# Allegro board pc043c_single_maroc_29.brd
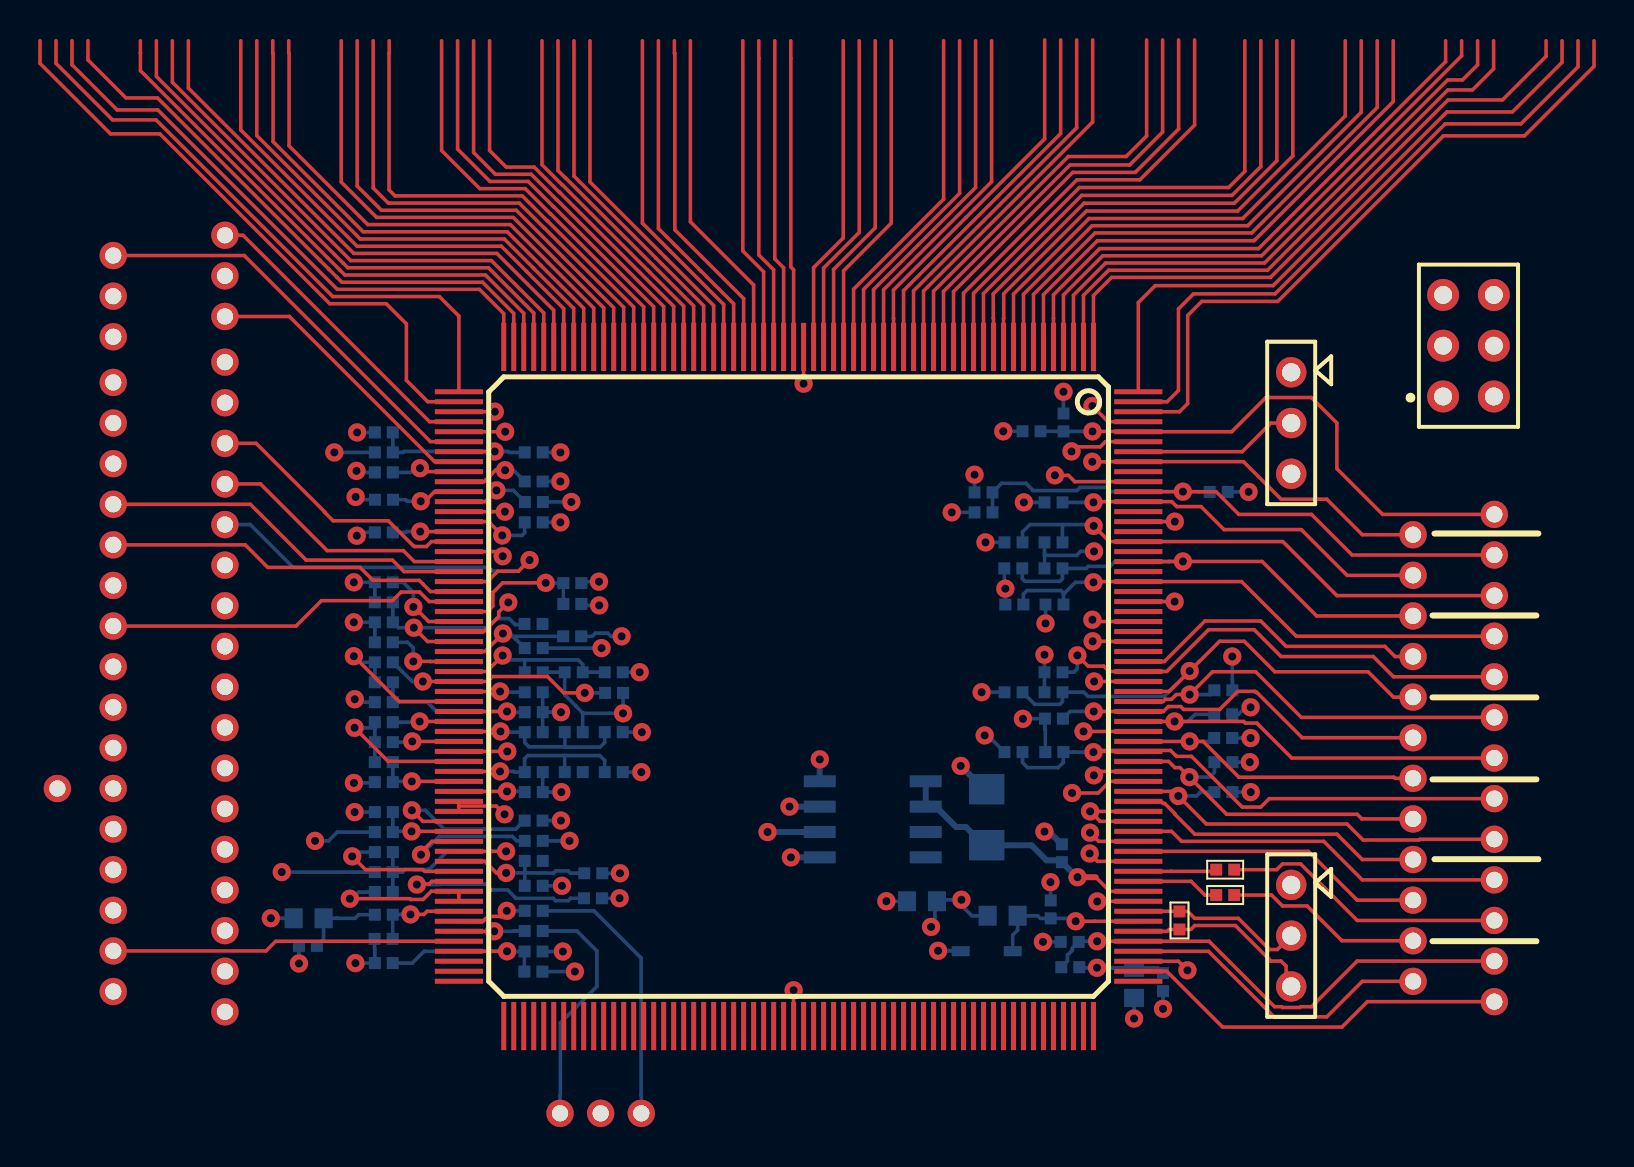
[diagram p0: board, top side]
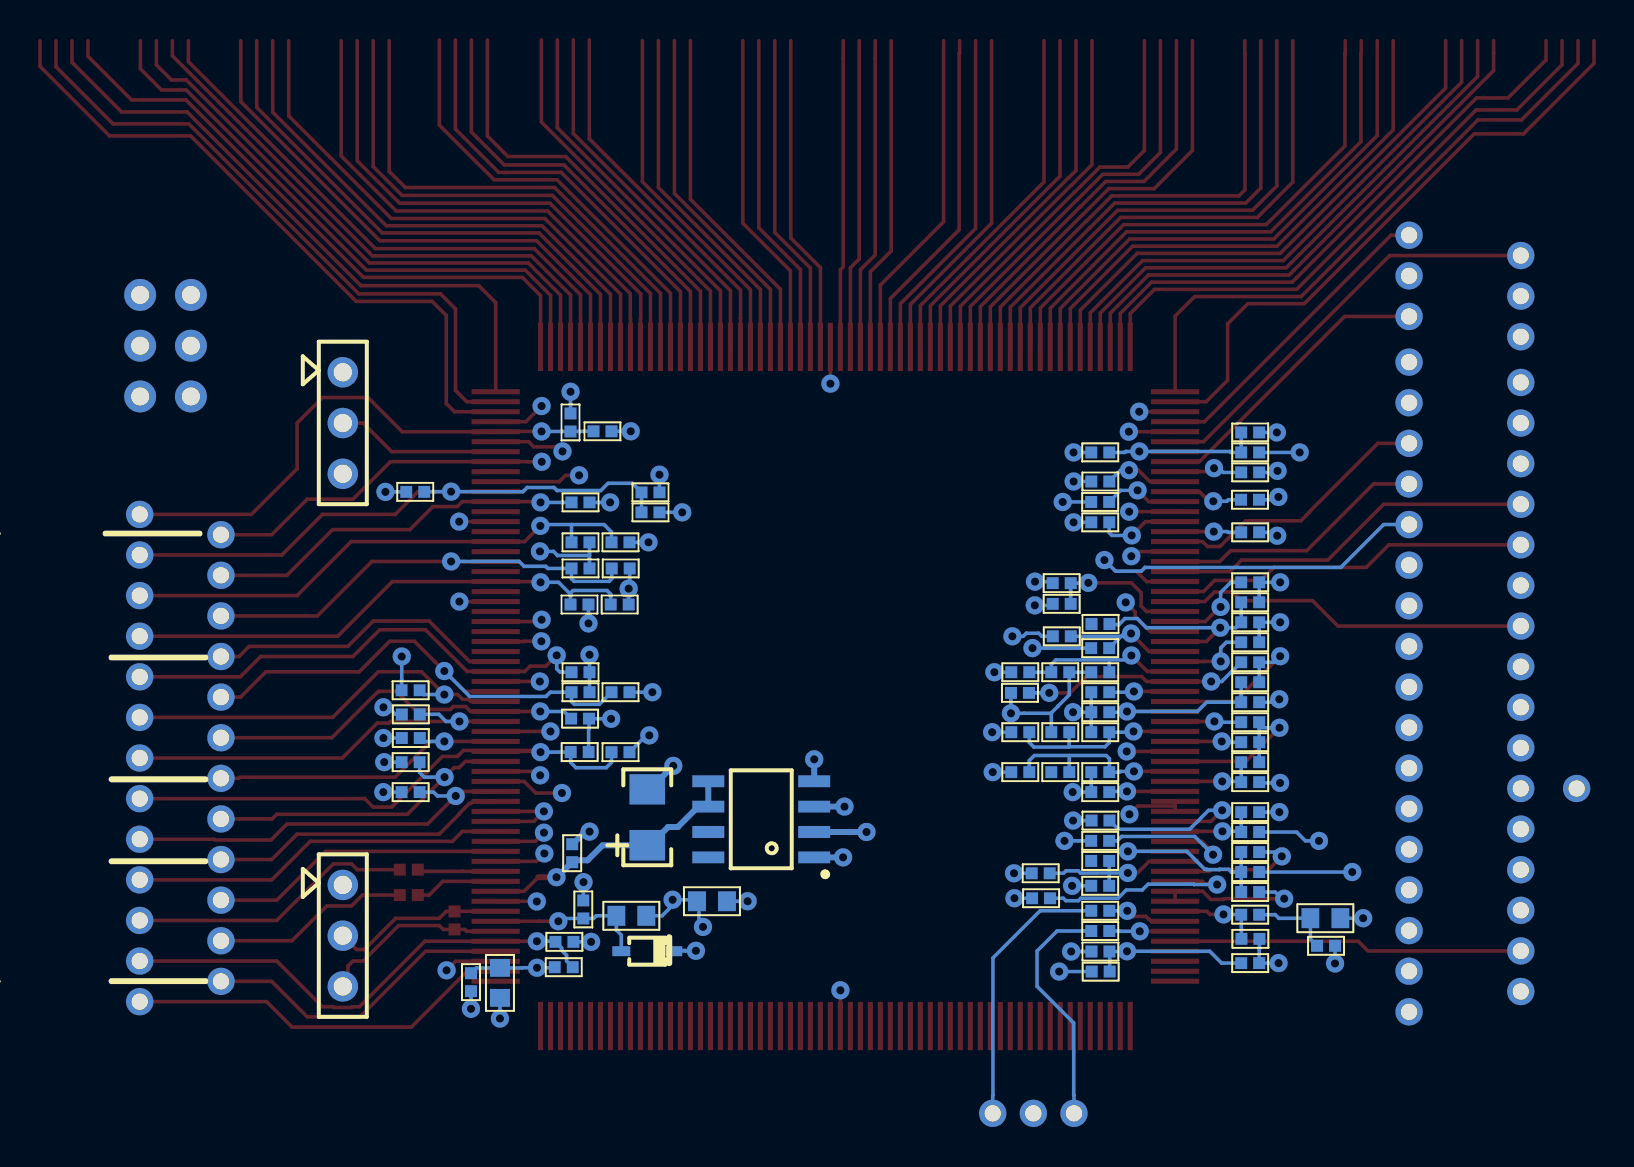
[diagram p1: board, bottom side, seen from below]

No outline. copper layers: TOP, L2, L3, L4, L5, BOTTOM. Coordinates in mm from the lowest, leftmost part position.

## Design rules (mm)
net group OR: nets OR<0> OR<1>
net group ANALOG_IN: nets ANALOG_IN<0> ANALOG_IN<1> ANALOG_IN<2> ANALOG_IN<3> ANALOG_IN<4> ANALOG_IN<5> ANALOG_IN<6> ANALOG_IN<7> ANALOG_IN<8> ANALOG_IN<9> ANALOG_IN<10> ANALOG_IN<11> ANALOG_IN<12> ANALOG_IN<13> ANALOG_IN<14> ANALOG_IN<15> ANALOG_IN<16> ANALOG_IN<17> ANALOG_IN<18> ANALOG_IN<19> ANALOG_IN<20> ANALOG_IN<21> ANALOG_IN<22> ANALOG_IN<23> ANALOG_IN<24> ANALOG_IN<25> ANALOG_IN<26> ANALOG_IN<27> ANALOG_IN<28> ANALOG_IN<29> ANALOG_IN<30> ANALOG_IN<31> ANALOG_IN<32> ANALOG_IN<33> ANALOG_IN<34> ANALOG_IN<35> ANALOG_IN<36> ANALOG_IN<37> ANALOG_IN<38> ANALOG_IN<39> ANALOG_IN<40> ANALOG_IN<41> ANALOG_IN<42> ANALOG_IN<43> ANALOG_IN<44> ANALOG_IN<45> ANALOG_IN<46> ANALOG_IN<47> ANALOG_IN<48> ANALOG_IN<49> ANALOG_IN<50> ANALOG_IN<51> ANALOG_IN<52> ANALOG_IN<53> ANALOG_IN<54> ANALOG_IN<55> ANALOG_IN<56> ANALOG_IN<57> ANALOG_IN<58> ANALOG_IN<59> ANALOG_IN<60> ANALOG_IN<61> ANALOG_IN<62> ANALOG_IN<63>
net group SUM: nets SUM<1> SUM<2> SUM<3> SUM<4> SUM<5> SUM<6> SUM<7> SUM<8>
net group TRIG: nets TRIG<0> TRIG<1> TRIG<2> TRIG<3> TRIG<4> TRIG<5> TRIG<6> TRIG<7> TRIG<8> TRIG<9> TRIG<10> TRIG<11> TRIG<12> TRIG<13> TRIG<14> TRIG<15> TRIG<16> TRIG<17> TRIG<18> TRIG<19> TRIG<20> TRIG<21> TRIG<22> TRIG<23> TRIG<24> TRIG<25> TRIG<26> TRIG<27> TRIG<28> TRIG<29> TRIG<30> TRIG<31> TRIG<32> TRIG<33> TRIG<34> TRIG<35> TRIG<36> TRIG<37> TRIG<38> TRIG<39> TRIG<40> TRIG<41> TRIG<42> TRIG<43> TRIG<44> TRIG<45> TRIG<46> TRIG<47> TRIG<48> TRIG<49> TRIG<50> TRIG<51> TRIG<52> TRIG<53> TRIG<54> TRIG<55> TRIG<56> TRIG<57> TRIG<58> TRIG<59> TRIG<60> TRIG<61> TRIG<62> TRIG<63>

## Placement (name value [footprint] x y rotation side)
C1  100nF  [C0402]  50.64 8.58 180 bottom
C2  100nF  [C0402]  16.32 8.73 0 bottom
C3  100nF  [C0402]  25.75 23.87 180 bottom
C4  100nF  [C0402]  50.33 34.57 270 bottom
C5  100nF  [C0402]  49.83 28.57 0 bottom
C6  100nF  [C0402]  16.33 34.07 0 bottom
C7  100nF  [C0402]  49.83 27.27 0 bottom
C8  100nF  [C0402]  16.33 33.07 0 bottom
C9  100nF  [C0402]  25.76 25.49 180 bottom
C10  100nF  [C0402]  49.88 25.46 0 bottom
C11  100nF  [C0402]  16.33 17.57 0 bottom
C12  100nF  [C0402]  49.83 21.07 0 bottom
C13  100nF  [C0402]  16.33 22.57 0 bottom
C14  100nF  [C0402]  16.33 15.07 0 bottom
C15  100nF  [C0402]  16.33 13.07 0 bottom
C16  100nF  [C0402]  49.87 18.08 0 bottom
C17  100nF  [C0402]  16.33 11.07 0 bottom
C18  100nF  [C0402]  16.33 32.07 0 bottom
C19  100nF  [C0402]  23.83 17.07 180 bottom
C20  100nF  [C0402]  16.33 29.07 0 bottom
C21  100nF  [C0402]  23.83 19.07 180 bottom
C22  100nF  [C0402]  16.33 23.57 0 bottom
C23  100nF  [C0402]  49.85 19.75 0 bottom
C24  100nF  [C0402]  16.33 25.57 0 bottom
C25  100nF  [C0402]  58.33 16.07 180 bottom
C26  100nF  [C0402]  16.33 18.57 0 bottom
C27  100nF  [C0402]  23.83 21.07 180 bottom
C28  100nF  [C0402]  23.83 29.57 180 bottom
C29  100nF  [C0402]  23.83 22.07 0 bottom
C30  100nF  [C0402]  23.83 13.64 180 bottom
C31  100nF  [C0402]  58.33 21.17 180 bottom
C32  100nF  [C0402]  23.83 31.62 180 bottom
C33  100nF  [C0402]  23.83 20.07 180 bottom
C34  100nF  [C0402]  26.81 12.01 180 bottom
C35  100nF  [C0402]  49.83 22.07 0 bottom
C36  100nF  [C0402]  23.84 30.59 180 bottom
C37  100nF  [C0402]  58.33 17.57 180 bottom
C38  100nF  [C0402]  58.1 31.1 180 bottom
C39  100nF  [C0402]  16.34 30.7 0 bottom
C40  100nF  [C0402]  16.33 26.57 0 bottom
C41  100nF  [C0402]  23.83 16.07 180 bottom
C42  100nF  [C0402]  58.32 19.97 180 bottom
C43  100nF  [C0402]  49.83 30.57 0 bottom
C44  100nF  [C0402]  23.82 8.1 180 bottom
C45  100nF  [C0402]  23.82 14.65 180 bottom
C46  100nF  [C0402]  58.32 18.78 180 bottom
C47  100nF  [C0402]  16.33 19.57 0 bottom
C48  22uF  [C3216POL]  46.49 13.41 90 bottom
C50  100nF  [C0402]  49.69 10.2 270 bottom
C51  100nF  [C0402]  50.25 13.02 270 bottom
C52  10uF  [C0603]  53.86 6.53 90 bottom
C53  10uF  [C0603]  12.57 9.76 0 bottom
C54  10uF  [C0603]  43.25 10.61 0 bottom
D1  -  [SOD323_INV]  46.49 8.11 180 bottom
J1  -  [SAMTEC_SSW-103-01-G-D]  70.59 38.41 270 top
J3  -  [CONHE13D3X1M]  61.72 11.43 270 top
J4  -  [CONHE13D3X1M]  61.72 37.08 270 top
LK1  -  [1-HOLE_0-8P]  71.88 7.62 0 top
LK2  -  [1-HOLE_0-8P]  8.38 9.14 0 top
LK3  -  [1-HOLE_0-8P]  2.79 32.51 0 top
LK4  -  [1-HOLE_0-8P]  71.88 29.97 0 top
LK5  -  [1-HOLE_0-8P]  71.88 25.91 0 top
LK6  -  [1-HOLE_0-8P]  67.82 28.96 0 top
LK7  -  [1-HOLE_0-8P]  67.82 24.89 0 top
LK8  -  [1-HOLE_0-8P]  2.79 34.54 0 top
LK9  -  [1-HOLE_0-8P]  71.88 23.88 0 top
LK10  -  [1-HOLE_0-8P]  67.82 20.83 0 top
LK11  -  [1-HOLE_0-8P]  2.79 22.35 0 top
LK12  -  [1-HOLE_0-8P]  8.38 15.24 0 top
LK13  -  [1-HOLE_0-8P]  71.88 15.75 0 top
LK14  -  [1-HOLE_0-8P]  2.79 12.19 0 top
LK15  -  [1-HOLE_0-8P]  8.38 7.11 0 top
LK16  -  [1-HOLE_0-8P]  8.38 37.59 0 top
LK17  -  [1-HOLE_0-8P]  2.79 14.22 0 top
LK18  -  [1-HOLE_0-8P]  8.38 35.56 0 top
LK19  -  [1-HOLE_0-8P]  8.38 17.27 0 top
LK20  -  [1-HOLE_0-8P]  8.38 23.37 0 top
LK21  -  [1-HOLE_0-8P]  67.82 18.8 0 top
LK22  -  [1-HOLE_0-8P]  2.79 26.42 0 top
LK23  -  [1-HOLE_0-8P]  71.88 13.72 0 top
LK24  -  [1-HOLE_0-8P]  2.79 18.29 0 top
LK25  -  [1-HOLE_0-8P]  8.38 21.34 0 top
LK26  -  [1-HOLE_0-8P]  71.88 5.59 0 top
LK27  -  [1-HOLE_0-8P]  2.79 16.26 0 top
LK28  -  [1-HOLE_0-8P]  71.88 11.68 0 top
LK29  -  [1-HOLE_0-8P]  67.82 10.67 0 top
LK30  -  [1-HOLE_0-8P]  0 16.26 0 top
LK31  -  [1-HOLE_0-8P]  2.79 38.86 0 top
LK32  -  [1-HOLE_0-8P]  8.38 25.4 0 top
LK33  -  [1-HOLE_0-8P]  8.38 11.18 0 top
LK34  -  [1-HOLE_0-8P]  71.88 19.81 0 top
LK35  -  [1-HOLE_0-8P]  8.38 41.91 0 top
LK36  -  [1-HOLE_0-8P]  2.79 20.32 0 top
LK37  -  [1-HOLE_0-8P]  2.79 6.1 0 top
LK38  -  [1-HOLE_0-8P]  71.88 21.84 0 top
LK39  -  [1-HOLE_0-8P]  2.79 40.89 0 top
LK40  -  [1-HOLE_0-8P]  67.82 14.73 0 top
LK41  -  [1-HOLE_0-8P]  71.88 27.94 0 top
LK42  -  [1-HOLE_0-8P]  2.79 36.58 0 top
LK43  -  [1-HOLE_0-8P]  8.38 27.43 0 top
LK44  -  [1-HOLE_0-8P]  2.79 10.16 0 top
LK45  -  [1-HOLE_0-8P]  71.88 17.78 0 top
LK46  -  [1-HOLE_0-8P]  67.82 26.92 0 top
LK47  -  [1-HOLE_0-8P]  8.38 5.08 0 top
LK48  -  [1-HOLE_0-8P]  8.38 13.21 0 top
LK49  -  [1-HOLE_0-8P]  67.82 16.76 0 top
LK50  -  [1-HOLE_0-8P]  8.38 19.3 0 top
LK51  -  [1-HOLE_0-8P]  67.82 8.64 0 top
LK52  -  [1-HOLE_0-8P]  71.88 9.65 0 top
LK53  -  [1-HOLE_0-8P]  8.38 29.46 0 top
LK54  -  [1-HOLE_0-8P]  25.15 0 0 top
LK55  -  [1-HOLE_0-8P]  27.18 0 0 top
LK56  -  [1-HOLE_0-8P]  29.21 0 0 top
LK57  -  [1-HOLE_0-8P]  8.38 39.88 0 top
LK58  -  [1-HOLE_0-8P]  67.82 22.86 0 top
LK59  -  [1-HOLE_0-8P]  2.79 8.13 0 top
LK60  -  [1-HOLE_0-8P]  8.38 43.94 0 top
LK61  -  [1-HOLE_0-8P]  8.38 33.53 0 top
LK62  -  [1-HOLE_0-8P]  2.79 30.48 0 top
LK63  -  [1-HOLE_0-8P]  67.82 12.7 0 top
LK64  -  [1-HOLE_0-8P]  8.38 31.5 0 top
LK65  -  [1-HOLE_0-8P]  2.79 28.45 0 top
LK66  -  [1-HOLE_0-8P]  2.79 42.93 0 top
LK67  -  [1-HOLE_0-8P]  2.79 24.38 0 top
LK68  -  [1-HOLE_0-8P]  67.82 6.6 0 top
R1  51  [C0402]  58.42 10.92 0 top
R2  51  [C0402]  58.42 12.19 0 top
R3  10  [C0402]  50.67 7.31 180 bottom
R4  10  [C0402]  16.33 9.94 0 bottom
R5  10  [C0402]  23.83 23.28 0 bottom
R6  10  [C0402]  48.73 34.13 180 bottom
R7  10  [C0402]  47.83 28.57 180 bottom
R8  10  [C0402]  23.83 33.07 0 bottom
R9  10  [C0402]  47.82 27.27 180 bottom
R10  10  [C0402]  25.76 26.53 0 bottom
R11  10  [C0402]  47.87 25.46 180 bottom
R12  10  [C0402]  16.33 16.57 180 bottom
R13  10  [C0402]  47.83 21.07 180 bottom
R14  100  [C0402]  27.85 21.04 0 bottom
R15  10  [C0402]  16.33 14.07 180 bottom
R16  10  [C0402]  16.33 12.07 180 bottom
R17  100  [C0402]  47.83 18.07 180 bottom
R18  51  [C0402]  23.83 9.12 180 bottom
R19  51  [C0402]  23.83 10.13 180 bottom
R20  XX  [C0402]  25.83 17.07 0 bottom
R21  XX  [C0402]  27.83 17.07 180 bottom
R22  XX  [C0402]  25.83 19.07 0 bottom
R23  XX  [C0402]  27.83 19.07 180 bottom
R24  100  [C0402]  56.13 9.65 270 top
R25  XX  [C0402]  23.82 24.49 0 bottom
R26  XX  [C0402]  16.33 24.57 0 bottom
R27  1k  [C0402]  26.79 10.76 0 bottom
R28  XX  [C0402]  25.83 22.07 180 bottom
R29  XX  [C0402]  27.83 22.07 180 bottom
R30  XX  [C0402]  16.33 20.57 180 bottom
R31  XX  [C0402]  16.33 21.57 0 bottom
R32  XX  [C0402]  23.83 12.63 0 bottom
R33  XX  [C0402]  23.83 11.39 180 bottom
R34  XX  [C0402]  46.33 31.07 180 bottom
R35  XX  [C0402]  46.33 30.07 0 bottom
R36  XX  [C0402]  23.81 7.09 0 bottom
R37  XX  [C0402]  16.33 7.52 0 bottom
R42  82  [C0603]  47.29 9.88 180 bottom
R46  3.3  [C0402]  55.31 6.56 90 bottom
R47  3.3  [C0402]  12.54 8.38 0 bottom
RG1  2.5V  [SOIC127P600X175-8N]  40.79 14.71 0 bottom
U1  -  [PQFP240_050]  51.83 38.35 270 top

## Library data of the parts
C1-C47 C50 C51 = CAPCERSMDCL2: part number: CAPCERSMDCL2_0402-100NF,16V_GEN; tolerance: 10%
C48 = ELCAPTAN: part number: ELCAPTAN_SMD_A-22UF,6.3V
C52-C54 = CAPCERSMDCL2: part number: CAPCERSMDCL2_0603-10UF_X5R,6.3V; tolerance: 5%
D1 = DIODE_CA: part number: DIODE_CA_SCHOTTKY-RB751V40T1
J1 = CON6P: part number: CON6P-SSW-103-01-G-D
J3 J4 = CON3P: part number: CON3P-SIL254D
LK1-LK68 = 1-HOLE: part number: 1-HOLE_0-8-BASE
R1 R2 R18 R19 = RSMD0402: part number: RSMD0402_1/16W-51,1%; tolerance: 1%
R3-R13 R15 R16 = RSMD0402: part number: RSMD0402_1/16W-10R,5%; tolerance: 5%
R14 R17 = RSMD0402: part number: RSMD0402_1/16W-100,0.1%_GEN; tolerance: 0.1%
R20-R23 R25 R26 R28-R37 = RSMD0402: part number: RSMD0402_0.0625W-XX,1%; tolerance: 1%
R24 = RSMD0402: part number: RSMD0402_1/16W-100,1%; tolerance: 1%
R27 = RSMD0402: part number: RSMD0402_1/16W-1K,5%; tolerance: 5%
R42 = RSMD0603: part number: RSMD0603_1/10W-82,1%; tolerance: 1%
R46 R47 = RSMD0402: part number: RSMD0402_1/16W-3.3R,5%; tolerance: 5%
RG1 = TPS776XX: part number: TPS77625D
U1 = MAROC3: part number: MAROC3_PQFP-IN2P3

## Footprints (pads in the part's own frame, mm; a bottom-side part is the same pattern mirrored in y, then rotated)
1-HOLE_0-8P
  round 1.372 hole 0.813: 1(0,0)
C0402
  rect 0.6x0.6 smd: 1(-0.45,0) 2(0.45,0)
C0603
  rect 0.9x1 smd: 1(-0.75,0) 2(0.75,0)
C3216POL
  rect 1.524x1.778 smd: 1(0,0) 2(2.8,0)
CONHE13D3X1M
  round 1.524 hole 0.914: 1(0,0) 2(2.54,0) 3(5.08,0)
PQFP240_050
  rect 2.413x0.254 smd: 1(0,0) 2(0,-0.5) 3(0,-1) 4(0,-1.5) 5(0,-2) 6(0,-2.5) 7(0,-3) 8(0,-3.5) 9(0,-4) 10(0,-4.5) 11(0,-5) 12(0,-5.5) 13(0,-6) 14(0,-6.5) 15(0,-7) 16(0,-7.5) 17(0,-8) 18(0,-8.5) 19(0,-9) 20(0,-9.5) 21(0,-10) 22(0,-10.5) 23(0,-11) 24(0,-11.5) 25(0,-12) 26(0,-12.5) 27(0,-13) 28(0,-13.5) 29(0,-14) 30(0,-14.5) 31(0,-15) 32(0,-15.5) 33(0,-16) 34(0,-16.5) 35(0,-17) 36(0,-17.5) 37(0,-18) 38(0,-18.5) 39(0,-19) 40(0,-19.5) 41(0,-20) 42(0,-20.5) 43(0,-21) 44(0,-21.5) 45(0,-22) 46(0,-22.5) 47(0,-23) 48(0,-23.5) 49(0,-24) 50(0,-24.5) 51(0,-25) 52(0,-25.5) 53(0,-26) 54(0,-26.5) 55(0,-27) 56(0,-27.5) 57(0,-28) 58(0,-28.5) 59(0,-29) 60(0,-29.5) 121(33.987,-29.5) 122(33.987,-29) 123(33.987,-28.5) 124(33.987,-28) 125(33.987,-27.5) 126(33.987,-27) 127(33.987,-26.5) 128(33.987,-26) 129(33.987,-25.5) 130(33.987,-25) 131(33.987,-24.5) 132(33.987,-24) 133(33.987,-23.5) 134(33.987,-23) 135(33.987,-22.5) 136(33.987,-22) 137(33.987,-21.5) 138(33.987,-21) 139(33.987,-20.5) 140(33.987,-20) 141(33.987,-19.5) 142(33.987,-19) 143(33.987,-18.5) 144(33.987,-18) 145(33.987,-17.5) 146(33.987,-17) 147(33.987,-16.5) 148(33.987,-16) 149(33.987,-15.5) 150(33.987,-15) 151(33.987,-14.5) 152(33.987,-14) 153(33.987,-13.5) 154(33.987,-13) 155(33.987,-12.5) 156(33.987,-12) 157(33.987,-11.5) 158(33.987,-11) 159(33.987,-10.5) 160(33.987,-10) 161(33.987,-9.5) 162(33.987,-9) 163(33.987,-8.5) 164(33.987,-8) 165(33.987,-7.5) 166(33.987,-7) 167(33.987,-6.5) 168(33.987,-6) 169(33.987,-5.5) 170(33.987,-5) 171(33.987,-4.5) 172(33.987,-4) 173(33.987,-3.5) 174(33.987,-3) 175(33.987,-2.5) 176(33.987,-2) 177(33.987,-1.5) 178(33.987,-1) 179(33.987,-0.5) 180(33.987,0)
  rect 0.254x2.413 smd: 61(2.244,-31.744) 62(2.744,-31.744) 63(3.244,-31.744) 64(3.744,-31.744) 65(4.244,-31.744) 66(4.744,-31.744) 67(5.244,-31.744) 68(5.744,-31.744) 69(6.244,-31.744) 70(6.744,-31.744) 71(7.244,-31.744) 72(7.744,-31.744) 73(8.243,-31.744) 74(8.743,-31.744) 75(9.243,-31.744) 76(9.743,-31.744) 77(10.243,-31.744) 78(10.743,-31.744) 79(11.243,-31.744) 80(11.743,-31.744) 81(12.243,-31.744) 82(12.743,-31.744) 83(13.243,-31.744) 84(13.743,-31.744) 85(14.243,-31.744) 86(14.743,-31.744) 87(15.243,-31.744) 88(15.743,-31.744) 89(16.244,-31.744) 90(16.744,-31.744) 91(17.244,-31.744) 92(17.744,-31.744) 93(18.244,-31.744) 94(18.744,-31.744) 95(19.244,-31.744) 96(19.744,-31.744) 97(20.244,-31.744) 98(20.744,-31.744) 99(21.244,-31.744) 100(21.744,-31.744) 101(22.244,-31.744) 102(22.744,-31.744) 103(23.244,-31.744) 104(23.744,-31.744) 105(24.244,-31.744) 106(24.744,-31.744) 107(25.244,-31.744) 108(25.744,-31.744) 109(26.244,-31.744) 110(26.744,-31.744) 111(27.244,-31.744) 112(27.744,-31.744) 113(28.244,-31.744) 114(28.744,-31.744) 115(29.244,-31.744) 116(29.744,-31.744) 117(30.244,-31.744) 118(30.744,-31.744) 119(31.244,-31.744) 120(31.744,-31.744) 181(31.744,2.244) 182(31.244,2.244) 183(30.744,2.244) 184(30.244,2.244) 185(29.744,2.244) 186(29.244,2.244) 187(28.744,2.244) 188(28.244,2.244) 189(27.744,2.244) 190(27.244,2.244) 191(26.744,2.244) 192(26.244,2.244) 193(25.744,2.244) 194(25.244,2.244) 195(24.744,2.244) 196(24.244,2.244) 197(23.744,2.244) 198(23.244,2.244) 199(22.744,2.244) 200(22.244,2.244) 201(21.744,2.244) 202(21.244,2.244) 203(20.744,2.244) 204(20.244,2.244) 205(19.744,2.244) 206(19.244,2.244) 207(18.744,2.244) 208(18.244,2.244) 209(17.744,2.244) 210(17.244,2.244) 211(16.744,2.244) 212(16.244,2.244) 213(15.743,2.244) 214(15.243,2.244) 215(14.743,2.244) 216(14.243,2.244) 217(13.743,2.244) 218(13.243,2.244) 219(12.743,2.244) 220(12.243,2.244) 221(11.743,2.244) 222(11.243,2.244) 223(10.743,2.244) 224(10.243,2.244) 225(9.743,2.244) 226(9.243,2.244) 227(8.743,2.244) 228(8.243,2.244) 229(7.744,2.244) 230(7.244,2.244) 231(6.744,2.244) 232(6.244,2.244) 233(5.744,2.244) 234(5.244,2.244) 235(4.744,2.244) 236(4.244,2.244) 237(3.744,2.244) 238(3.244,2.244) 239(2.744,2.244) 240(2.244,2.244)
SAMTEC_SSW-103-01-G-D
  round 1.6 hole 0.9: 1(2.54,-1.27) 2(2.54,1.27) 3(0,-1.27) 4(0,1.27) 5(-2.54,-1.27) 6(-2.54,1.27)
SOD323_INV
  rect 0.9x0.5 smd: 1(1.3,0) 2(-1.3,0)
SOIC127P600X175-8N
  rect 1.6x0.6 smd: 1(-2.65,1.905) 2(-2.65,0.635) 3(-2.65,-0.635) 4(-2.65,-1.905) 5(2.65,-1.905) 6(2.65,-0.635) 7(2.65,0.635) 8(2.65,1.905)

## Nets
AVDD: C29.2(B<0>) C54.2(B<0>) J1.6(A<5>) R5.2(B<0>) R6.2(B<0>) R7.2(B<0>) R8.2(B<0>) R9.2(B<0>) R10.2(B<0>) R11.2(B<0>) R12.2(B<0>) R13.2(B<0>) R14.2(B<0>) R15.2(B<0>) R16.2(B<0>) R17.2(B<0>) R20.2(B<0>) R22.2(B<0>) R25.2(B<0>) R27.2(B<0>) R28.2(B<0>) R30.2(B<0>) R32.2(B<0>) R34.2(B<0>) R36.2(B<0>) R42.2(B<0>) R46.1(A<0>) R47.1(A<0>) RG1.3(IN<1>) RG1.4(IN<2>)
GND_SIGNAL: C1.2(B<0>) C2.1(A<0>) C3.1(A<0>) C4.1(A<0>) C5.1(A<0>) C6.1(A<0>) C7.1(A<0>) C8.1(A<0>) C9.1(A<0>) C10.1(A<0>) C11.1(A<0>) C12.1(A<0>) C13.1(A<0>) C14.1(A<0>) C15.1(A<0>) C16.1(A<0>) C17.1(A<0>) C18.1(A<0>) C19.1(A<0>) C20.1(A<0>) C21.1(A<0>) C22.1(A<0>) C23.1(A<0>) C24.1(A<0>) C25.1(A<0>) C26.1(A<0>) C27.1(A<0>) C28.1(A<0>) C30.1(A<0>) C31.1(A<0>) C32.1(A<0>) C33.1(A<0>) C34.1(A<0>) C35.1(A<0>) C36.1(A<0>) C37.1(A<0>) C38.1(A<0>) C39.1(A<0>) C40.1(A<0>) C41.1(A<0>) C42.1(A<0>) C43.1(A<0>) C44.1(A<0>) C45.1(A<0>) C46.1(A<0>) C47.1(A<0>) C48.2(B<0>) C50.1(A<0>) C51.1(A<0>) C52.1(A<0>) C53.1(A<0>) C54.1(A<0>) D1.1(K<0>) J1.2(A<1>) J1.4(A<3>) J1.5(A<4>) J3.1(A<0>) J4.3(A<2>) LK30.1(A<0>) LK55.1(A<0>) R21.1(A<0>) R23.1(A<0>) R26.1(A<0>) R29.1(A<0>) R31.1(A<0>) R33.1(A<0>) R35.1(A<0>) R37.1(A<0>) RG1.1(GND) RG1.2(EN*) U1.30(GND_PA2) U1.63(GND_PA) U1.65(VSSA) U1.73(GND_NMOS) U1.77(GND_W) U1.85(GND_DAC) U1.92(E_FSU) U1.98(GND_WILK) U1.102(VSSA2) U1.103(VSSM) U1.109(GND_DISCRI) U1.111(VSSD) U1.112(GNDD) U1.150(VSSD2) U1.183(GNDD2) U1.189(VSSD3) U1.195(GND_DISCRI2) U1.197(VSSM2) U1.198(VSS) U1.202(GND_FSU) U1.206(GND_FSB1) U1.211(GND_FSB0) U1.217(GND_CAPA) U1.219(GND_SS) U1.227(GND_OTAG) U1.231(GND_NMOS2) U1.235(VSSI) U1.237(GND_PA3)
VDD_BUF1: C7.2(B<0>) LK7.1(A<0>) R9.1(A<0>) U1.223(VDD_BUF1)
VDD_DAC: C3.2(B<0>) LK3.1(A<0>) R5.1(A<0>) U1.87(VDD_DAC)
VDD_DISCRI: C14.2(B<0>) LK14.1(A<0>) R15.1(A<0>) U1.105(VDD_DISCRI)
VDD_DISCRIADC: C15.2(B<0>) C17.2(B<0>) LK15.1(A<0>) R16.1(A<0>) U1.107(VDD_DISCRIADC) U1.193(VDD_DISCRIADC2)
VDD_FSB: C12.2(B<0>) LK10.1(A<0>) R13.1(A<0>) U1.210(VDD_FSB)
VDD_FSU1: C13.2(B<0>) LK11.1(A<0>) R14.1(A<0>) U1.90(VDD_FSU1)
VDD_FSU2: C16.2(B<0>) LK13.1(A<0>) R17.1(A<0>) U1.204(VDD_FSU2)
VDD_OTAG: C5.2(B<0>) LK5.1(A<0>) R7.1(A<0>) U1.225(VDD_OTAG)
VDD_PA: C6.2(B<0>) C8.2(B<0>) LK6.1(A<0>) R8.1(A<0>) U1.67(VDD_PA) U1.233(VDD_PA2)
VDD_PAD: C4.2(B<0>) LK4.1(A<0>) R6.1(A<0>) U1.236(VDD_PAD)
VDD_SS: C10.2(B<0>) LK9.1(A<0>) R11.1(A<0>) U1.221(VDD_SS)
VDD_W: C9.2(B<0>) LK8.1(A<0>) R10.1(A<0>) U1.83(VDD_W)
VDD_WILK: C11.2(B<0>) LK12.1(A<0>) R12.1(A<0>) U1.100(VDD_WILK)
VDDD: C1.1(A<0>) LK1.1(A<0>) R3.2(B<0>) U1.185(VDDD)
VDDD2: C2.2(B<0>) LK2.1(A<0>) R4.2(B<0>) U1.113(VDDD2)
ADC_DAV: LK54.1(A<0>) R18.1(A<0>)
ANALOG_IN<0>: U1.238(IN0)
ANALOG_IN<1>: U1.239(IN1)
ANALOG_IN<2>: U1.240(IN2)
ANALOG_IN<3>: U1.1(IN3)
ANALOG_IN<4>: U1.2(IN4)
ANALOG_IN<5>: U1.3(IN5)
ANALOG_IN<6>: U1.4(IN6)
ANALOG_IN<7>: U1.5(IN7)
ANALOG_IN<8>: U1.6(IN8)
ANALOG_IN<9>: U1.7(IN9)
ANALOG_IN<10>: U1.8(IN10)
ANALOG_IN<11>: U1.9(IN11)
ANALOG_IN<12>: U1.10(IN12)
ANALOG_IN<13>: U1.11(IN13)
ANALOG_IN<14>: U1.12(IN14)
ANALOG_IN<15>: U1.13(IN15)
ANALOG_IN<16>: U1.14(IN16)
ANALOG_IN<17>: U1.15(IN17)
ANALOG_IN<18>: U1.16(IN18)
ANALOG_IN<19>: U1.17(IN19)
ANALOG_IN<20>: U1.18(IN20)
ANALOG_IN<21>: U1.19(IN21)
ANALOG_IN<22>: U1.20(IN22)
ANALOG_IN<23>: U1.21(IN23)
ANALOG_IN<24>: U1.22(IN24)
ANALOG_IN<25>: U1.23(IN25)
ANALOG_IN<26>: U1.24(IN26)
ANALOG_IN<27>: U1.25(IN27)
ANALOG_IN<28>: U1.26(IN28)
ANALOG_IN<29>: U1.27(IN29)
ANALOG_IN<30>: U1.28(IN30)
ANALOG_IN<31>: U1.29(IN31)
ANALOG_IN<32>: U1.31(IN32)
ANALOG_IN<33>: U1.32(IN33)
ANALOG_IN<34>: U1.33(IN34)
ANALOG_IN<35>: U1.34(IN35)
ANALOG_IN<36>: U1.35(IN36)
ANALOG_IN<37>: U1.36(IN37)
ANALOG_IN<38>: U1.37(IN38)
ANALOG_IN<39>: U1.38(IN39)
ANALOG_IN<40>: U1.39(IN40)
ANALOG_IN<41>: U1.40(IN41)
ANALOG_IN<42>: U1.41(IN42)
ANALOG_IN<43>: U1.42(IN43)
ANALOG_IN<44>: U1.43(IN44)
ANALOG_IN<45>: U1.44(IN45)
ANALOG_IN<46>: U1.45(IN46)
ANALOG_IN<47>: U1.46(IN47)
ANALOG_IN<48>: U1.47(IN48)
ANALOG_IN<49>: U1.48(IN49)
ANALOG_IN<50>: U1.49(IN50)
ANALOG_IN<51>: U1.50(IN51)
ANALOG_IN<52>: U1.51(IN52)
ANALOG_IN<53>: U1.52(IN53)
ANALOG_IN<54>: U1.53(IN54)
ANALOG_IN<55>: U1.54(IN55)
ANALOG_IN<56>: U1.55(IN56)
ANALOG_IN<57>: U1.56(IN57)
ANALOG_IN<58>: U1.57(IN58)
ANALOG_IN<59>: U1.58(IN59)
ANALOG_IN<60>: U1.59(IN60)
ANALOG_IN<61>: U1.60(IN61)
ANALOG_IN<62>: U1.61(IN62)
ANALOG_IN<63>: U1.62(IN63)
CK_40M: J3.2(A<1>) R24.1(A<0>) U1.188(CK_40M)
CK_R: LK64.1(A<0>) U1.78(CK_R)
CK_SC: LK57.1(A<0>) U1.68(CK_SC)
CKB_40M: J3.3(A<2>) R24.2(B<0>) U1.186(CKB_40M)
CTEST: J4.1(A<0>)
D_R: LK67.1(A<0>) U1.82(D_R)
D_SC: LK60.1(A<0>) U1.64(D_SC)
EN_OTAG: LK58.1(A<0>) U1.213(EN_OTAG)
G_DIODE: C27.2(B<0>) LK25.1(A<0>) U1.91(G_DIODE)
HOLD1: LK62.1(A<0>) U1.79(HOLD1)
HOLD2: LK65.1(A<0>) U1.81(HOLD2)
IB_INTEG: C41.2(B<0>) LK44.1(A<0>) U1.101(IB_INTEG)
IB_SUM: C35.2(B<0>) LK38.1(A<0>) U1.212(IB_SUM)
IB_W: C31.2(B<0>) LK34.1(A<0>) U1.209(IB_W)
IBI_BUF: C28.2(B<0>) LK31.1(A<0>) U1.74(IBI_BUF)
IBI_SS: C32.2(B<0>) LK35.1(A<0>) U1.70(IBI_SS)
IBO_DAC: C40.2(B<0>) LK43.1(A<0>) U1.84(IBO_DAC)
IBO_SS: C36.2(B<0>) LK39.1(A<0>) U1.72(IBO_SS)
IREF_DAC: C24.2(B<0>) LK22.1(A<0>) R25.1(A<0>) R26.2(B<0>) U1.86(IREF_DAC)
OR<0>: LK51.1(A<0>) R1.2(B<0>)
OR<1>: LK52.1(A<0>) R2.2(B<0>)
OUT_ADC: LK56.1(A<0>) R19.1(A<0>)
OUT_FS: J1.3(A<2>) U1.201(OUT_FS)
OUT_Q: J1.1(A<0>) U1.215(OUT_Q)
PWR_ON: R27.1(A<0>) U1.110(PWR_ON)
QBUF_R: LK61.1(A<0>) U1.76(QBUF_R)
QBUF_SC: LK63.1(A<0>) U1.199(QBUF_SC)
RAMP: LK27.1(A<0>) U1.97(RAMP)
RSTB_R: LK53.1(A<0>) U1.80(RSTB_R)
RSTN_ADC: LK68.1(A<0>) U1.184(RSTN_ADC)
RSTN_SC: LK66.1(A<0>) U1.66(RSTN_SC)
START_ADCB: LK59.1(A<0>) U1.116(START_ADCB)
SUM<1>: U1.228(SUM1)
SUM<2>: U1.226(SUM2)
SUM<3>: U1.224(SUM3)
SUM<4>: U1.222(SUM4)
SUM<5>: U1.220(SUM5)
SUM<6>: U1.218(SUM6)
SUM<7>: U1.216(SUM7)
SUM<8>: U1.214(SUM8)
TRIG<0>: LK26.1(A<0>) U1.182(OUT0)
TRIG<1>: U1.181(OUT1)
TRIG<2>: U1.180(OUT2)
TRIG<3>: U1.179(OUT3)
TRIG<4>: U1.178(OUT4)
TRIG<5>: U1.177(OUT5)
TRIG<6>: U1.176(OUT6)
TRIG<7>: U1.175(OUT7)
TRIG<8>: U1.174(OUT8)
TRIG<9>: U1.173(OUT9)
TRIG<10>: U1.172(OUT10)
TRIG<11>: U1.171(OUT11)
TRIG<12>: U1.170(OUT12)
TRIG<13>: U1.169(OUT13)
TRIG<14>: U1.168(OUT14)
TRIG<15>: U1.167(OUT15)
TRIG<16>: U1.166(OUT16)
TRIG<17>: U1.165(OUT17)
TRIG<18>: U1.164(OUT18)
TRIG<19>: U1.163(OUT19)
TRIG<20>: U1.162(OUT20)
TRIG<21>: U1.161(OUT21)
TRIG<22>: U1.160(OUT22)
TRIG<23>: U1.159(OUT23)
TRIG<24>: U1.158(OUT24)
TRIG<25>: U1.157(OUT25)
TRIG<26>: U1.156(OUT26)
TRIG<27>: U1.155(OUT27)
TRIG<28>: U1.154(OUT28)
TRIG<29>: U1.153(OUT29)
TRIG<30>: U1.152(OUT30)
TRIG<31>: U1.151(OUT31)
TRIG<32>: U1.149(OUT32)
TRIG<33>: U1.148(OUT33)
TRIG<34>: U1.147(OUT34)
TRIG<35>: U1.146(OUT35)
TRIG<36>: U1.145(OUT36)
TRIG<37>: U1.144(OUT37)
TRIG<38>: U1.143(OUT38)
TRIG<39>: U1.142(OUT39)
TRIG<40>: U1.141(OUT40)
TRIG<41>: U1.140(OUT41)
TRIG<42>: U1.139(OUT42)
TRIG<43>: U1.138(OUT43)
TRIG<44>: U1.137(OUT44)
TRIG<45>: U1.136(OUT45)
TRIG<46>: U1.135(OUT46)
TRIG<47>: U1.134(OUT47)
TRIG<48>: U1.133(OUT48)
TRIG<49>: U1.132(OUT49)
TRIG<50>: U1.131(OUT50)
TRIG<51>: U1.130(OUT51)
TRIG<52>: U1.129(OUT52)
TRIG<53>: U1.128(OUT53)
TRIG<54>: U1.127(OUT54)
TRIG<55>: U1.126(OUT55)
TRIG<56>: U1.125(OUT56)
TRIG<57>: U1.124(OUT57)
TRIG<58>: U1.123(OUT58)
TRIG<59>: U1.122(OUT59)
TRIG<60>: U1.121(OUT60)
TRIG<61>: U1.120(OUT61)
TRIG<62>: U1.119(OUT62)
TRIG<63>: U1.118(OUT63)
UNNAMED_1_MAROC3_I1_OR0: R1.1(A<0>) U1.191(OR_0)
UNNAMED_1_MAROC3_I1_OR1: R2.1(A<0>) U1.192(OR_1)
UNNAMED_2_CAPCERSMDCL2_I82_B: C53.2(B<0>) R4.1(A<0>) R47.2(B<0>)
UNNAMED_2_CAPCERSMDCL2_I84_B: C52.2(B<0>) R3.1(A<0>) R46.2(B<0>)
UNNAMED_3_CON3P_I231_A: J4.2(A<1>) U1.234(CTEST)
UNNAMED_3_MAROC3_I1_ADCDAV: R18.2(B<0>) U1.115(ADC_DAV)
UNNAMED_3_MAROC3_I1_OUTADC: R19.2(B<0>) U1.114(OUT_ADC)
V_BG: C25.2(B<0>) LK23.1(A<0>) U1.200(V_BG)
VB_OTAFSU: C37.2(B<0>) LK40.1(A<0>) U1.203(VB_OTAFSU)
VBI_DISCRI: C45.2(B<0>) LK48.1(A<0>) U1.104(VBI_DISCRI)
VBI_DISCRIADC: C44.2(B<0>) LK47.1(A<0>) R36.1(A<0>) R37.2(B<0>) U1.117(VBI_DISCRIADC)
VBI_FSB: C42.2(B<0>) LK45.1(A<0>) U1.207(VBI_FSB)
VBI_PA: C38.2(B<0>) LK41.1(A<0>) R34.1(A<0>) R35.2(B<0>) U1.230(VBI_PA)
VBI_TZ: C29.1(A<0>) LK32.1(A<0>) R28.1(A<0>) R29.2(B<0>) U1.89(VBI_TZ)
VBM_DISCRI: C30.2(B<0>) LK33.1(A<0>) U1.106(VBM_DISCRI)
VBO_DISCRI: C34.2(B<0>) LK37.1(A<0>) R32.1(A<0>) R33.2(B<0>) U1.108(VBO_DISCRI)
VBO_FSB: C46.2(B<0>) LK49.1(A<0>) U1.205(VBO_FSB)
VBO_TZ: C33.2(B<0>) LK36.1(A<0>) R30.1(A<0>) R31.2(B<0>) U1.93(VBO_TZ)
VCASC_FSU: C47.2(B<0>) LK50.1(A<0>) U1.94(VCASC_FSU)
VCASC_NMOS: C43.2(B<0>) LK46.1(A<0>) U1.229(VCASC_NMOS)
VCASC_PMOS: C39.2(B<0>) LK42.1(A<0>) U1.71(VCASC_PMOS)
VGAIN_PA: C18.2(B<0>) LK16.1(A<0>) U1.69(VGAIN_PA)
VH: C48.1(A<0>) C51.2(B<0>) RG1.5(OUT<1>) RG1.6(OUT<2>) U1.190(VH)
VL: C50.2(B<0>) D1.2(A<0>) R42.1(A<0>) U1.187(VL)
VREF_DAC: C22.2(B<0>) LK20.1(A<0>) U1.88(VREF_DAC)
VREF_FSB: C23.2(B<0>) LK21.1(A<0>) U1.208(VREF_FSB)
VREF_FSU: C26.2(B<0>) LK24.1(A<0>) U1.96(VREF_FSU)
VREF_RAMP: C19.2(B<0>) LK17.1(A<0>) R20.1(A<0>) R21.2(B<0>) U1.99(VREF_RAMP)
VREF_SS: C20.2(B<0>) LK18.1(A<0>) U1.75(VREF_SS)
VSLOPE: C21.2(B<0>) LK19.1(A<0>) R22.1(A<0>) R23.2(B<0>) U1.95(VSLOPE)
VTH0: LK28.1(A<0>) U1.196(VTH0)
VTH1: LK29.1(A<0>) U1.194(VTH1)

Pads without a net: RG1 7 8; U1 232

## Via types
v1: diameter 0.914, hole 0.406, TOP to BOTTOM, 152 vias

## Routing (per net, layer and track width the routed paths; a pad name or vN(x,y) marks a point on that pad's centre or on a via; arc(x,y) is an arc through that point)
AVDD: length 41
  BOTTOM w0.18: 45.22,10.99 v1(45.22,10.69) ; v1(45.22,10.69) 45.22,10.41 45.75,9.88 R42.2 ; v1(45.22,10.69) 44.08,10.69 C54.2 43.9,10.51 43.9,9.53 v1(43.7,9.33) ; R30.2 15.02,20.57 v1(14.88,20.72) ; 26.28,20.02 26.28,20.04 25.94,20.38 25.94,20.38 25.38,20.94 R28.2 C29.2 ; 26.28,20.02 R22.2 ; 26.28,20.02 27.62,20.02 27.62,20.02 v1(28.3,20.02) R14.2 ; R17.2 46.54,18.91 v1(46.39,18.91) ; R11.2 v1(47.42,26.26) 47.37,26.31 R9.2 ; R6.2 v1(47.32,34.13) ; R47.1 v1(12.09,7.5) ; R5.2 v1(27.22,23.28) ; R15.2 14,14.07 13.56,13.63 v1(12.89,13.63) ; R8.2 v1(25.16,33.07) ; R10.2 26.29,26.61 v1(27.1,26.61) ; R12.2 15.84,16.53 v1(14.83,16.53) ; R13.2 v1(46.24,21.07) ; R7.2 v1(46.43,28.57) ; R34.2 v1(45.88,31.96) ; v1(11.23,12.07) R16.2 ; R27.2 v1(28.12,10.76) ; R36.2 v1(25.89,7.09) ; R46.1 v1(55.31,5.23)
  BOTTOM w0.3: RG1.4 v1(38.14,17.71) ; RG1.3 v1(36.62,15.35)
GND_SIGNAL: length 151
  TOP w0.18: v1(56.53,7.16) 56.08,7.61 U1.183 ; v1(22.28,27.88) 22.27,27.88 22.04,28.11 U1.77 ; v1(52.02,10.6) 52.02,10.61 52.02,10.61 U1.189 ; v1(51.66,14.04) 51.66,14.04 52.09,13.61 U1.195 ; U1.30 v1(37.33,36.51) ; v1(14.87,19.29) 16.55,17.61 U1.98 ; U1.219 55.5,25.61 55.5,25.61 v1(55.89,25.61) ; v1(22.37,14.96) 21.96,15.38 20.09,15.38 ; v1(22.38,30.11) 21.71,30.11 21.71,30.11 U1.73 ; v1(50.73,33.12) 50.96,33.35 52.17,33.35 52.43,33.61 U1.235 ; U1.109 18.38,12.11 18.29,12.2 15.41,12.2 v1(14.75,12.86) ; U1.92 17.09,20.61 v1(14.83,22.87) ; U1.111 20.09,11.06 ; 20.09,11.06 20.03,11.12 18.71,11.12 18.29,10.7 17.67,10.7 17.63,10.74 v1(14.63,10.74) ; 20.09,11.06 U1.112 ; U1.63 v1(21.88,35.11) ; 20.09,15.38 U1.103 ; 20.09,15.38 U1.102 ; U1.85 21.33,24.11 22.08,24.86 22.08,25.09 v1(22.56,25.57) ; U1.65 v1(22.4,34.11) ; v1(49.9,31.93) 50.58,31.93 50.89,31.61 U1.231 ; U1.197 52.16,14.61 v1(51.66,15.11) U1.198 ; U1.211 v1(51.87,21.61) ; v1(51.78,24.7) 51.87,24.61 U1.217 ; U1.227 v1(55.9,29.61) ; U1.206 v1(51.33,19.11) ; v1(51.85,16.91) 52.04,17.11 U1.202 ; U1.150 v1(36.83,6.16) ; v1(51.78,35.4) 52.56,34.61 U1.237
  BOTTOM w0.18: v1(14.87,19.29) 15.83,19.29 15.88,19.25 ; v1(14.98,28.91) 15.15,29.07 C20.1 ; C53.1 v1(10.68,9.76) ; v1(27.11,25.42) 26.29,25.42 C9.1 ; C52.1 v1(53.86,4.74) ; v1(49.38,22.95) C35.1 C12.1 ; R33.1 v1(25.24,11.39) ; C15.1 14.96,13.07 v1(14.75,12.86) ; C54.1 v1(41.47,10.61) ; v1(25.21,16.07) C41.1 C19.1 ; v1(58.77,22.86) 58.77,21.7 58.78,21.69 C31.1 ; C4.1 v1(50.33,36.11) ; C10.1 v1(49.43,24.52) ; C1.2 v1(49.3,8.58) ; C33.1 C27.1 ; C33.1 C21.1 ; C33.1 v1(25.19,20.07) ; C36.1 v1(25.71,30.59) ; v1(44.06,8.13) 44.56,8.13 ; 44.56,8.13 45.17,8.13 D1.1 ; 44.56,8.13 44.57,8.15 44.83,8.15 ; C6.1 v1(15,34.07) ; v1(14.91,7.52) R37.1 15.88,8.2 15.87,8.21 C2.1 ; C18.1 15.04,32.07 v1(14.96,32.15) ; v1(14.83,24.57) R26.1 C22.1 ; 49.38,27.92 49.38,27.92 50.99,27.92 50.99,27.93 51.18,28.12 v1(51.86,28.12) ; 49.38,27.92 C7.1 ; 49.38,27.92 49.38,28.06 C5.1 ; C43.1 v1(48.35,30.57) ; C39.1 15.06,30.7 v1(14.92,30.85) ; v1(59.69,18.78) C46.1 ; C16.1 49.42,19.21 49.4,19.24 C23.1 v1(48.3,19.74) ; C44.1 v1(25.29,8.1) ; C14.1 v1(14.87,15.07) ; v1(28.23,23.87) 27.69,23.87 27.53,24.03 26.91,24.03 26.76,23.87 C3.1 ; C45.1 v1(25.19,14.65) ; R31.1 C13.1 15.13,22.57 v1(14.83,22.87) ; C34.1 v1(28.14,12.01) ; C38.1 v1(59.59,31.1) ; R29.1 v1(29.13,22.07) ; 15.88,19.25 C26.1 C11.1 ; 15.88,19.25 C47.1 ; C37.1 v1(59.65,17.57) ; C32.1 v1(25.16,31.62) ; R23.1 v1(29.24,19.07) ; v1(49.38,14.1) 49.6,14.1 ; 50.22,13.47 C51.1 ; v1(59.69,20.32) 59.44,20.32 59.08,19.97 C42.1 ; C28.1 v1(25.16,29.57) ; C50.1 v1(49.68,11.57) ; C30.1 24.94,13.64 24.95,13.63 v1(25.62,13.63) ; C8.1 v1(13.85,33.07) ; R35.1 v1(44.74,30.07) ; v1(14.83,26.57) C40.1 C24.1 ; C17.1 15.08,11.07 14.75,10.74 v1(14.63,10.74) ; R21.1 v1(29.21,17.07) ; C25.1 v1(59.7,16.07)
  BOTTOM w0.3: C48.2 46.36,16.21 v1(45.19,17.39) ; RG1.2 v1(35.52,14.08) ; RG1.1 v1(36.7,12.81) ; 49.6,14.1 50.22,13.47
VDD_BUF1: length 24.2
  TOP w0.18: LK7.1 62.99,24.89 60.27,27.62 v1(56.3,27.62) 55.63,27.62 55.62,27.61 U1.223
  BOTTOM w0.18: v1(56.3,27.62) 52.9,27.62 52.66,27.37 51.57,27.37 51.47,27.27 C7.2 50.28,26.75 50.15,26.62 48.4,26.62 48.27,26.75 R9.1
VDD_DAC: length 30.1
  TOP w0.18: v1(22.29,24.01) 21.39,23.11 U1.87
  L3 w0.18: LK3.1 9.65,32.51 13.95,28.21 16.75,28.21 20.95,24.01 v1(22.29,24.01)
  BOTTOM w0.18: C3.2 22.43,23.87 v1(22.29,24.01) 22.64,24.01 22.92,23.73 22.93,23.73 R5.1
VDD_DISCRI: length 20.4
  TOP w0.18: v1(17.72,14.11) U1.105
  L3 w0.18: LK14.1 10.16,12.19 10.92,12.95 11.54,12.95 11.94,12.56 13.34,12.56 14.33,13.56 17.16,13.56 v1(17.72,14.11)
  BOTTOM w0.18: C14.2 R15.1 16.82,14.11 v1(17.72,14.11)
VDD_DISCRIADC: length 60.2
  TOP w0.18: v1(51.64,13) 52.03,12.61 U1.193 ; U1.107 v1(22.45,13.11)
  L3 w0.18: v1(51.64,13) 50.68,13 49.94,12.26 49.39,12.26 48.94,11.81 34.44,11.81 33.31,12.94 24.75,12.94 24.58,13.11 v1(22.45,13.11) 15.99,6.66 10.97,6.66 10.51,7.11 LK15.1
  BOTTOM w0.18: C17.2 R16.1 ; R16.1 17.27,12.07 17.41,12.21 17.86,12.21 17.88,12.2 18.5,12.2 18.51,12.21 18.6,12.21 19.5,13.11 v1(22.45,13.11) ; R16.1 C15.2
VDD_FSB: length 25.7
  TOP w0.18: LK10.1 66.84,20.83 65.57,22.1 60.9,22.1 59.37,23.62 58.14,23.62 57.12,22.61 57.12,22.61 v1(56.64,22.13) 55.83,21.32 55.82,21.32 55.61,21.11 U1.210
  BOTTOM w0.18: R13.1 48.89,20.47 50.14,20.47 50.28,20.6 C12.2 51.35,21.07 51.56,20.86 55.37,20.86 v1(56.64,22.13)
VDD_FSU1: length 27.3
  TOP w0.18: v1(18.28,21.61) U1.90 21.51,21.61 21.76,21.86 24.52,21.86 25.33,21.04 v1(26.38,21.04)
  L3 w0.18: LK11.1 12.27,22.35 12.45,22.18 15.94,22.18 16.51,21.61 v1(18.28,21.61)
  BOTTOM w0.18: v1(18.28,21.61) 17.75,21.61 17.24,22.12 17.23,22.12 C13.2 ; R14.1 v1(26.38,21.04)
VDD_FSU2: length 28.4
  TOP w0.18: LK13.1 60.62,15.75 60.2,15.33 59.27,15.33 56.74,17.86 55.98,17.86 55.93,17.92 55.69,18.16 51.92,18.16 51.87,18.11 ; 51.87,18.11 U1.204 ; 51.87,18.11 v1(51.83,18.07)
  BOTTOM w0.18: R17.1 48.28,17.56 48.54,17.3 50.06,17.3 50.32,17.56 C16.2 50.84,18.08 50.84,18.07 v1(51.83,18.07)
VDD_OTAG: length 26.6
  TOP w0.18: LK5.1 64.01,25.91 61.31,28.61 U1.225 52.63,28.61 v1(51.84,29.4)
  BOTTOM w0.18: v1(51.84,29.4) 51.78,29.46 50.27,29.46 ; 50.27,29.46 50.28,29.45 C5.2 ; 50.27,29.46 48.65,29.46 48.28,29.09 R7.1
VDD_PA: length 58.3
  TOP w0.18: LK6.1 65.28,28.96 63.5,30.73 61.21,30.73 59.34,32.61 U1.233 52.45,32.61 52.44,32.61 v1(51.77,32.61) ; U1.67 21.55,33.11 21.56,33.12 v1(21.88,33.12)
  L3 w0.18: v1(21.88,33.12) 23,33.12 23.75,32.37 25.54,32.37 26.68,31.23 48.02,31.23 48.06,31.27 48.64,31.27 48.68,31.23 50.4,31.23 v1(51.77,32.61)
  BOTTOM w0.18: R8.1 22.6,33.07 22.55,33.12 v1(21.88,33.12) 17.34,33.12 17.3,33.07 C8.2 C6.2
VDD_PAD: length 27.2
  TOP w0.18: LK4.1 66.29,29.97 64.01,32.26 64.01,34.54 62.73,35.82 60.46,35.82 58.75,34.11 U1.236 54.06,34.12 v1(51.78,34.12)
  BOTTOM w0.18: R6.1 C4.2 v1(51.78,34.12)
VDD_SS: length 26.2
  TOP w0.18: LK9.1 61.98,23.88 59.24,26.61 U1.221 51.87,26.61 v1(51.83,26.57)
  BOTTOM w0.18: C10.2 50.33,25.98 ; 50.33,25.98 50.33,26.04 50.21,26.16 48.5,26.16 48.32,25.98 R11.1 ; 50.33,25.98 50.93,26.57 v1(51.83,26.57)
VDD_W: length 32.2
  TOP w0.18: v1(24.43,26.55) 22.28,26.55 21.79,26.06 21.79,25.39 21.51,25.11 U1.83
  L3 w0.18: LK8.1 9.45,34.54 14.22,29.77 16.2,29.77 19.43,26.55 v1(24.43,26.55)
  BOTTOM w0.18: C9.2 R10.1 24.79,26.53 24.78,26.55 v1(24.43,26.55)
VDD_WILK: length 14.2
  TOP w0.18: U1.100 v1(17.73,16.61)
  L3 w0.18: v1(17.73,16.61) 16.56,16.61 15.79,15.84 11.52,15.84 10.92,15.24 LK12.1
  BOTTOM w0.18: v1(17.73,16.61) 16.82,16.61 R12.1 C11.2
VDDD: length 24.8
  TOP w0.18: v1(52.01,8.61) U1.185 57.61,8.61 60.89,5.33 61.25,5.33 61.29,5.3 62.16,5.3 62.19,5.33 62.74,5.33 65.02,7.62 LK1.1
  BOTTOM w0.18: R3.2 50.53,7.62 50.53,7.91 50.78,8.16 50.78,8.27 51.08,8.58 C1.1 51.12,8.61 v1(52.01,8.61)
VDDD2: length 14.6
  TOP w0.18: U1.113 18.49,10.11 18.34,9.95 v1(17.66,9.95)
  L3 w0.18: v1(17.66,9.95) 15.55,9.95 14.73,9.14 11.04,9.14 10.97,9.07 10.39,9.07 10.32,9.14 LK2.1
  BOTTOM w0.18: v1(17.66,9.95) 16.88,9.95 R4.2 16.78,10.08 C2.2
ADC_DAV: length 12
  BOTTOM w0.18: LK54.1 25.15,0.9 25.16,0.92 25.16,4.52 26.99,6.35 26.99,8.12 25.99,9.12 R18.1
ANALOG_IN<0>: length 33.8
  TOP w0.18: 76.87,53.67 76.87,52.39 73.39,48.91 69.33,48.91 61.05,40.63 57.25,40.63 56.54,39.93 56.54,35.52 56.13,35.11 U1.238
ANALOG_IN<1>: length 32.6
  TOP w0.18: U1.239 55.52,35.61 56.08,36.18 56.08,40.25 56.84,41.01 60.91,41.01 69.42,49.51 73.21,49.51 76.07,52.37 76.07,53.67
ANALOG_IN<2>: length 31.7
  TOP w0.18: 75.27,53.67 75.27,52.59 72.79,50.11 69.51,50.11 60.82,41.42 54.92,41.42 54.07,40.58 U1.240
ANALOG_IN<3>: length 30.9
  TOP w0.18: 74.47,53.67 74.47,52.89 72.29,50.71 69.57,50.71 60.69,41.83 52.74,41.83 51.83,40.93 U1.1
ANALOG_IN<4>: length 29.2
  TOP w0.18: 71.85,53.67 71.85,52.27 70.79,51.21 69.56,51.21 60.54,42.19 52.59,42.19 51.33,40.93 U1.2
ANALOG_IN<5>: length 28.8
  TOP w0.18: U1.3 50.83,40.94 52.44,42.55 60.39,42.55 69.55,51.71 70.29,51.71 71.05,52.47 71.05,53.67
ANALOG_IN<6>: length 28.2
  TOP w0.18: 70.25,53.67 70.25,52.92 60.24,42.91 52.29,42.91 50.33,40.95 U1.4
ANALOG_IN<7>: length 28.1
  TOP w0.18: 69.45,53.67 69.45,52.63 60.09,43.27 52.14,43.27 49.83,40.96 49.83,39.78 49.83,39.78 U1.5
ANALOG_IN<8>: length 27.2
  TOP w0.18: U1.6 49.33,40.97 52.03,43.67 59.86,43.67 59.89,43.7 59.9,43.7 66.83,50.63 66.83,53.67
ANALOG_IN<9>: length 27
  TOP w0.18: 66.03,53.67 66.03,50.34 59.75,44.06 51.91,44.06 48.83,40.98 U1.7
ANALOG_IN<10>: length 26.9
  TOP w0.18: U1.8 48.33,40.99 51.76,44.42 59.55,44.42 65.23,50.1 65.23,53.67
ANALOG_IN<11>: length 26.7
  TOP w0.18: 64.43,53.67 64.43,49.91 59.29,44.78 51.61,44.78 47.83,41 U1.9
ANALOG_IN<12>: length 25.7
  TOP w0.18: U1.10 47.33,39.78 47.34,39.79 47.34,41.02 51.48,45.15 59.04,45.15 61.8,47.91 61.8,53.67
ANALOG_IN<13>: length 25.6
  TOP w0.18: 61,53.67 61,47.67 58.88,45.55 51.36,45.55 46.82,41 46.82,39.79 46.83,39.78 U1.11
ANALOG_IN<14>: length 25.5
  TOP w0.18: 60.2,53.67 60.2,47.38 58.76,45.94 51.24,45.94 46.33,41.03 U1.12
ANALOG_IN<15>: length 25.3
  TOP w0.18: 59.4,53.67 59.4,47.14 58.59,46.33 51.12,46.33 45.83,41.04 U1.13
ANALOG_IN<16>: length 22
  TOP w0.18: 56.89,53.71 56.89,49.45 54.15,46.72 51,46.72 45.33,41.04 U1.14
ANALOG_IN<17>: length 21.9
  TOP w0.18: U1.15 44.83,41.12 50.79,47.09 53.92,47.09 56.09,49.26 56.09,53.71
ANALOG_IN<18>: length 21.6
  TOP w0.18: U1.16 44.33,41.13 50.66,47.46 53.64,47.46 55.29,49.11 55.29,53.71
ANALOG_IN<19>: length 21.5
  TOP w0.18: 54.49,53.71 54.49,48.91 53.46,47.88 50.57,47.88 43.83,41.14 U1.17
ANALOG_IN<20>: length 18.9
  TOP w0.18: 51.79,53.71 51.79,49.61 43.33,41.15 U1.18
ANALOG_IN<21>: length 18.7
  TOP w0.18: 50.99,53.71 50.99,49.32 42.83,41.16 U1.19
ANALOG_IN<22>: length 18.6
  TOP w0.18: 50.19,53.71 50.19,49.03 42.33,41.17 U1.20
ANALOG_IN<23>: length 18.5
  TOP w0.18: 49.39,53.71 49.39,48.77 45.88,45.25 41.83,41.2 41.83,39.78 41.83,39.78 U1.21
ANALOG_IN<24>: length 17.6
  TOP w0.18: U1.22 41.33,41.21 46.73,46.62 46.73,53.67
ANALOG_IN<25>: length 17.4
  TOP w0.18: 45.93,53.67 45.93,46.33 40.83,41.22 U1.23
ANALOG_IN<26>: length 17.3
  TOP w0.18: 45.13,53.67 45.13,46.04 40.33,41.23 U1.24
ANALOG_IN<27>: length 17.2
  TOP w0.18: 44.33,53.67 44.33,45.75 39.83,41.24 U1.25
ANALOG_IN<28>: length 16.3
  TOP w0.18: U1.26 39.33,42.16 41.71,44.55 41.71,53.67
ANALOG_IN<29>: length 16.2
  TOP w0.18: 40.91,53.67 40.91,44.31 38.83,42.23 U1.27
ANALOG_IN<30>: length 16.1
  TOP w0.18: 40.11,53.67 40.11,44.08 38.33,42.3 U1.28
ANALOG_IN<31>: length 15.9
  TOP w0.18: U1.29 37.83,42.32 39.31,43.8 39.31,53.67
ANALOG_IN<32>: length 15.4
  TOP w0.18: U1.31 36.83,42.21 36.69,42.35 36.69,52.79 36.69,52.79 36.69,53.67
ANALOG_IN<33>: length 15.5
  TOP w0.18: 35.89,53.67 35.89,42.76 36.33,42.31 U1.32
ANALOG_IN<34>: length 15.6
  TOP w0.18: U1.33 35.83,42.21 35.09,42.95 35.09,52.79 35.09,52.79 35.09,53.67
ANALOG_IN<35>: length 15.8
  TOP w0.18: U1.34 35.33,42.11 34.29,43.16 34.29,53.67
ANALOG_IN<36>: length 16.6
  TOP w0.18: U1.35 34.83,41.45 31.67,44.61 31.67,53.67
ANALOG_IN<37>: length 16.8
  TOP w0.18: U1.36 34.33,40.77 32.23,42.87 31.43,43.68 30.89,44.21 30.89,53.03 30.87,53.06 30.87,53.67
ANALOG_IN<38>: length 16.9
  TOP w0.18: U1.37 33.83,40.51 32.18,42.16 31.03,43.32 30.93,43.41 30.82,43.53 30.07,44.28 30.07,53.67
ANALOG_IN<39>: length 17
  TOP w0.18: U1.38 33.33,40.48 30.64,43.17 30.64,43.17 29.27,44.54 29.27,53.67
ANALOG_IN<40>: length 17.9
  TOP w0.18: 26.64,53.67 26.64,46.61 30.15,43.1 30.39,42.87 30.52,42.73 32.83,40.42 U1.39
ANALOG_IN<41>: length 18
  TOP w0.18: 25.84,53.67 25.84,46.9 29.94,42.8 32.33,40.41 U1.40
ANALOG_IN<42>: length 18.1
  TOP w0.18: U1.41 31.83,40.4 25.42,46.81 25.41,46.81 25.04,47.18 25.04,53.67
ANALOG_IN<43>: length 18.3
  TOP w0.18: U1.42 31.33,40.39 29.65,42.08 29.62,42.1 29.52,42.21 25.27,46.45 25.27,46.45 24.24,47.47 24.24,53.67
ANALOG_IN<44>: length 20
  TOP w0.18: 21.62,53.67 21.62,48.18 22.45,47.35 23.85,47.35 25.12,46.09 25.13,46.09 30.83,40.38 U1.43
ANALOG_IN<45>: length 20.3
  TOP w0.18: 20.82,53.67 20.82,48.08 21.91,46.99 23.7,46.99 24.97,45.73 24.98,45.73 30.33,40.38 U1.44
ANALOG_IN<46>: length 20.5
  TOP w0.18: U1.45 29.83,40.37 24.83,45.37 24.82,45.37 23.55,46.63 21.64,46.63 20.02,48.25 20.02,53.67
ANALOG_IN<47>: length 20.8
  TOP w0.18: 19.22,53.67 19.22,48.18 21.13,46.27 23.4,46.27 24.67,45.01 24.68,45.01 29.33,40.36 U1.46
ANALOG_IN<48>: length 24.1
  TOP w0.18: U1.47 28.83,40.35 24.53,44.65 24.52,44.65 23.26,45.91 16.89,45.91 16.59,46.21 16.59,53.05 16.6,53.06 16.6,53.67
ANALOG_IN<49>: length 24.4
  TOP w0.18: U1.48 28.33,40.34 24.38,44.29 24.37,44.29 23.11,45.55 16.55,45.55 15.8,46.31 15.8,53.67
ANALOG_IN<50>: length 24.6
  TOP w0.18: U1.49 27.83,40.32 25.27,42.87 25.27,42.88 22.96,45.19 16.21,45.19 15,46.41 15,53.67
ANALOG_IN<51>: length 24.8
  TOP w0.18: 14.2,53.67 14.2,46.61 15.97,44.83 22.81,44.83 24.91,42.73 24.91,42.73 27.33,40.31 U1.50
ANALOG_IN<52>: length 25.8
  TOP w0.18: U1.51 26.83,40.3 24.55,42.58 24.55,42.58 22.66,44.47 15.53,44.47 11.59,48.41 11.59,53.04 11.58,53.06 11.58,53.67
ANALOG_IN<53>: length 26
  TOP w0.18: 10.78,53.67 10.78,53.06 10.79,53.04 10.79,48.62 15.3,44.11 22.51,44.11 24.19,42.43 24.19,42.43 26.33,40.29 U1.52
ANALOG_IN<54>: length 26.1
  TOP w0.18: 9.98,53.67 9.98,48.93 15.15,43.75 22.36,43.75 23.83,42.28 23.83,42.28 25.83,40.28 U1.53
ANALOG_IN<55>: length 26.2
  TOP w0.18: 9.18,53.67 9.18,49.21 14.99,43.39 22.21,43.39 23.47,42.13 23.47,42.13 25.33,40.27 U1.54
ANALOG_IN<56>: length 27.1
  TOP w0.18: 6.55,53.67 6.55,51.31 14.83,43.03 21.98,43.03 24.83,40.19 U1.55
ANALOG_IN<57>: length 27.1
  TOP w0.18: U1.56 24.33,40.06 21.71,42.67 14.68,42.67 5.75,51.6 5.75,53.67
ANALOG_IN<58>: length 27.3
  TOP w0.18: 4.95,53.67 4.95,51.89 13.87,42.97 14.53,42.31 21.56,42.31 23.83,40.05 U1.57
ANALOG_IN<59>: length 27.4
  TOP w0.18: U1.58 23.33,40.04 21.41,41.95 14.38,41.95 14.14,42.19 4.15,52.18 4.15,53.06 4.15,53.06 4.15,53.67
ANALOG_IN<60>: length 29.2
  TOP w0.18: 1.53,53.67 1.53,52.71 3.43,50.81 5.01,50.81 13.15,42.68 13.57,42.25 13.99,41.83 13.99,41.83 14.23,41.59 21.27,41.59 22.83,40.03 U1.59
ANALOG_IN<61>: length 29.6
  TOP w0.18: 0.73,53.67 0.73,52.47 2.99,50.21 5.02,50.21 14,41.23 21.12,41.23 22.33,40.02 U1.60
ANALOG_IN<62>: length 30.3
  TOP w0.18: -0.07,53.67 -0.07,52.54 2.76,49.71 4.94,49.71 13.78,40.87 19.11,40.87 20.09,39.9 U1.61
ANALOG_IN<63>: length 30.8
  TOP w0.18: U1.62 18.53,35.61 17.46,36.68 17.46,39.51 16.45,40.51 13.63,40.51 13.21,40.93 5.13,49.01 2.66,49.01 -0.87,52.54 -0.87,53.67
CK_40M: length 8.9
  TOP w0.18: 56.31,10.1 56.3,10.11 U1.188 ; 56.31,10.1 R24.1 ; 56.31,10.1 56.55,10.1 56.9,9.76 59.08,9.76 60.64,8.2 61.03,8.2 J3.2
CK_R: length 13.3
  TOP w0.18: U1.78 17.86,27.61 17.31,28.16 13.5,28.16 10.16,31.5 LK64.1
CK_SC: length 14.7
  TOP w0.18: LK57.1 11.6,39.88 18.87,32.61 U1.68
CKB_40M: length 9.5
  TOP w0.18: U1.186 55.53,9.11 55.62,9.2 R24.2 56.7,9.2 56.9,9.4 58.93,9.4 60.71,7.62 61.21,7.62 61.47,7.37 61.47,6.6 J3.3
D_R: length 18.2
  TOP w0.18: LK67.1 11.94,24.38 13.21,25.65 16.76,25.65 17.2,26.09 18.12,26.09 18.6,25.61 U1.82
D_SC: length 15.6
  TOP w0.18: LK60.1 9.28,43.94 18.62,34.61 U1.64
EN_OTAG: length 15.3
  TOP w0.18: U1.213 55.38,22.61 57.4,24.64 60.2,24.64 61.47,23.37 66.41,23.37 66.92,22.86 LK58.1
G_DIODE: length 17.7
  TOP w0.18: U1.91 v1(22.15,21.11)
  L3 w0.18: LK25.1 11.98,21.34 12.45,21.8 15.54,21.8 16.42,20.91 20.32,20.91 20.52,21.11 v1(22.15,21.11)
  BOTTOM w0.18: v1(22.15,21.11) 22.18,21.07 C27.2
HOLD1: length 18.7
  TOP w0.18: U1.79 17.34,27.11 16.76,27.69 12.45,27.69 9.65,30.48 LK62.1
HOLD2: length 18.3
  TOP w0.18: U1.81 18.66,26.11 18.29,26.49 18.29,26.49 18.11,26.67 15.79,26.67 15.14,27.32 10.52,27.32 9.4,28.45 LK65.1
IB_INTEG: length 25.5
  TOP w0.18: U1.101 v1(22.49,16.11)
  L3 w0.18: LK44.1 9.25,10.16 9.78,10.7 13.48,10.7 14.22,11.44 16.88,11.44 17.62,12.17 18.55,12.17 22.05,15.67 22.05,15.67 v1(22.49,16.11)
  BOTTOM w0.18: v1(22.49,16.11) 23.34,16.11 C41.2
IB_SUM: length 24.5
  TOP w0.18: v1(51.02,22.92) 51.56,22.38 52.35,22.38 52.62,22.11 U1.212 55.5,22.11 57.59,24.2 59.87,24.2 61.21,22.86 65.83,22.86 66.84,21.84 LK38.1
  BOTTOM w0.18: C35.2 50.85,22.07 51.02,22.24 v1(51.02,22.92)
IB_W: length 20.7
  TOP w0.18: U1.209 55.32,20.61 55.43,20.72 55.73,20.72 55.97,20.96 v1(56.64,20.96) 57.78,22.1 59.94,22.1 62.23,19.81 LK34.1
  BOTTOM w0.18: v1(56.64,20.96) 57.66,20.96 C31.2
IBI_BUF: length 28.1
  TOP w0.18: U1.74 21.56,29.61 v1(22.25,28.92)
  L3 w0.18: LK31.1 12.95,38.86 19.05,32.77 19.05,32.12 v1(22.25,28.92)
  BOTTOM w0.18: v1(22.25,28.92) 23.24,28.92 23.38,29.06 C28.2
IBI_SS: length 21.8
  TOP w0.18: U1.70 21.34,31.61 21.91,32.18 v1(22.39,32.18)
  L3 w0.18: LK35.1 12.04,41.91 21.77,32.18 v1(22.39,32.18)
  BOTTOM w0.18: C32.2 23.38,31.62 22.82,32.18 v1(22.39,32.18)
IBO_DAC: length 14.8
  TOP w0.18: U1.84 18.58,24.61 18.14,25.05 18.1,25.05 v1(17.81,25.34)
  L3 w0.18: LK43.1 15.72,27.43 v1(17.81,25.34)
  BOTTOM w0.18: v1(17.81,25.34) 17.81,26.06 17.3,26.57 C40.2
IBO_SS: length 27
  TOP w0.18: U1.72 21.4,30.61 v1(21.96,31.17)
  L3 w0.18: v1(21.96,31.17) 17.83,35.31 17.78,35.31 16.51,36.58 16.51,36.63 12.25,40.89 12.19,40.89 LK39.1
  BOTTOM w0.18: v1(21.96,31.17) 22.81,31.17 23.39,30.6 C36.2
IREF_DAC: length 26.5
  TOP w0.18: v1(17.83,24.3) 18.52,23.61 U1.86
  L3 w0.18: LK22.1 12.95,26.42 13.49,25.88 16.25,25.88 v1(17.83,24.3)
  BOTTOM w0.18: R25.1 23.33,24.46 22.9,24.46 22.6,24.76 21.98,24.76 21.52,24.3 v1(17.83,24.3) 17.05,24.3 R26.2 C24.2
OR<0>: length 9.9
  TOP w0.18: R1.2 60.74,10.92 61.29,10.38 62.52,10.38 63.25,9.65 64.26,8.64 LK51.1
OR<1>: length 14.3
  TOP w0.18: LK52.1 65.02,9.65 62.19,12.48 61.29,12.48 61,12.19 R2.2
OUT_ADC: length 13.7
  BOTTOM w0.18: LK56.1 29.21,0.9 29.2,0.91 29.2,7.77 26.84,10.13 R19.1
OUT_FS: length 38.2
  TOP w0.18: U1.201 52.65,16.61 52.07,16.03 v1(50.76,16.03)
  L3 w0.18: v1(50.76,16.03) 53.41,16.03 53.89,16.51 53.89,20.81 58.09,25.01 62.29,25.01 65.79,28.51 65.79,35.91 68.21,38.33 69.25,38.33 69.32,38.4 J1.3
OUT_Q: length 36
  TOP w0.18: v1(51.79,23.62) 52.64,23.62 52.65,23.61 U1.215
  L3 w0.18: 69.33,35.87 70.59,37.13 70.59,39.11 70.09,39.61 67.19,39.61 64.29,36.71 64.29,29.81 61.29,26.81 58.59,26.81 55.4,23.62 v1(51.79,23.62) ; 69.33,35.87 69.25,35.79 ; 69.33,35.87 J1.1
  BOTTOM w0.18: 51.72,23.7 v1(51.79,23.62)
PWR_ON: length 10.9
  TOP w0.18: U1.110 18.73,11.61 18.6,11.48 18.01,11.48 v1(17.98,11.45)
  BOTTOM w0.18: R27.1 25.67,10.76 25.55,10.64 24.93,10.64 24.8,10.76 22.94,10.76 22.52,11.18 21.73,11.18 21.44,11.47 19.17,11.47 19.15,11.45 v1(17.98,11.45)
QBUF_R: length 14
  TOP w0.18: U1.76 18.71,28.61 18.46,28.36 17.87,28.36 17.82,28.41 17.8,28.41 16.55,29.65 13.79,29.65 13.36,30.08 13.36,30.11 9.94,33.53 LK61.1
QBUF_SC: length 15
  TOP w0.18: U1.199 55.21,15.61 55.31,15.51 55.39,15.51 55.9,15 55.9,14.97 56.9,13.97 64.01,13.97 65.28,12.7 LK63.1
RAMP: length 22.9
  TOP w0.18: U1.97 v1(22.51,18.11)
  L3 w0.18: LK27.1 10.67,16.26 11.72,17.31 21.08,17.31 21.88,18.11 v1(22.51,18.11)
RSTB_R: length 20.4
  TOP w0.18: U1.80 21.51,26.61 22.03,27.13 23.07,27.13 v1(23.62,27.69)
  BOTTOM w0.18: v1(23.62,27.69) 23.07,27.13 21.78,27.13 21.59,27.32 11.79,27.32 9.65,29.46 LK53.1
RSTN_ADC: length 15.8
  TOP w0.18: LK68.1 65.28,6.6 63.5,4.83 60.87,4.83 57.58,8.11 U1.184
RSTN_SC: length 21.2
  TOP w0.18: LK66.1 9.35,42.93 18.66,33.61 U1.66
START_ADCB: length 17.5
  TOP w0.18: LK59.1 10.44,8.13 10.92,8.61 U1.116
TRIG<0>: length 19.5
  TOP w0.18: U1.182 55.5,7.11 58.29,4.32 64.26,4.32 65.53,5.59 LK26.1
UNNAMED_1_MAROC3_I1_OR0: length 4.2
  TOP w0.18: R1.1 57.4,10.92 56.72,11.61 U1.191
UNNAMED_1_MAROC3_I1_OR1: length 3.9
  TOP w0.18: U1.192 55.73,12.11 57.89,12.11 R2.1
UNNAMED_2_CAPCERSMDCL2_I82_B: length 4.2
  BOTTOM w0.18: R47.2 13.32,8.72 C53.2 13.98,9.76 13.99,9.76 14.89,9.76 15.08,9.94 R4.1
UNNAMED_2_CAPCERSMDCL2_I84_B: length 4.3
  BOTTOM w0.18: R3.1 51.15,7.28 v1(52.01,7.28) 52.75,7.28 52.76,7.28 C52.2 55.05,7.28 R46.2
UNNAMED_3_CON3P_I231_A: length 8.2
  TOP w0.18: U1.234 59.27,33.11 60.71,34.54 J4.2
UNNAMED_3_MAROC3_I1_ADCDAV: length 3.3
  TOP w0.18: U1.115 v1(21.85,9.11)
  BOTTOM w0.18: v1(21.85,9.11) 22.85,9.11 22.86,9.12 R18.2
UNNAMED_3_MAROC3_I1_OUTADC: length 3.5
  TOP w0.18: U1.114 21.3,9.61 21.4,9.71 21.4,9.71 21.55,9.86 22.16,9.86 22.18,9.84 v1(22.48,10.13)
  BOTTOM w0.18: R19.2 v1(22.48,10.13)
V_BG: length 20.7
  TOP w0.18: U1.200 55.76,16.11 55.99,15.88 v1(56.07,15.88) 57.48,14.48 64.52,14.48 65.32,13.68 68.13,13.68 68.16,13.72 LK23.1
  BOTTOM w0.18: C25.2 57.18,16.07 56.99,15.88 v1(56.07,15.88)
VB_OTAFSU: length 16.8
  TOP w0.18: LK40.1 65.26,14.73 65.02,14.97 58.49,14.97 v1(56.63,16.83) 56.15,17.3 55.9,17.3 55.59,17.61 U1.203
  BOTTOM w0.18: v1(56.63,16.83) 57.65,16.83 57.88,17.06 C37.2
VBI_DISCRI: length 19.3
  TOP w0.18: U1.104 18.29,14.61 v1(17.73,15.16)
  L3 w0.18: v1(17.73,15.16) 16.95,15.16 15.72,13.94 13.86,13.94 13.46,14.33 11.94,14.33 11.07,13.46 9.91,13.46 9.65,13.21 LK48.1
  BOTTOM w0.18: v1(17.73,15.16) 18.41,15.16 19.35,14.22 22.92,14.22 23.36,14.65 C45.2
VBI_DISCRIADC: length 25.6
  TOP w0.18: U1.117 v1(22.49,8.11)
  L3 w0.18: LK47.1 19.46,5.08 v1(22.49,8.11)
  BOTTOM w0.18: R37.2 17.76,7.52 18.35,8.11 v1(22.49,8.11) 22.51,8.1 C44.2 23.36,8.09 R36.1
VBI_FSB: length 20.7
  TOP w0.18: U1.207 v1(55.89,19.61) 59.34,19.61 59.43,19.53 60,19.53 61.75,17.78 LK45.1
  BOTTOM w0.18: v1(55.89,19.61) 56.56,19.61 56.91,19.97 C42.2
VBI_PA: length 31.5
  TOP w0.18: U1.230 v1(56.3,31.11) 57.96,31.11 59.1,29.97 62.74,29.97 64.77,27.94 LK41.1
  BOTTOM w0.18: C38.2 57.13,31.1 57.12,31.11 v1(56.3,31.11) 52.71,31.11 52.5,31.32 51.16,31.32 51.01,31.17 48.81,31.17 48.45,31.53 47.23,31.53 R34.1 R35.2
VBI_TZ: length 23.7
  TOP w0.18: U1.89 21.47,22.11 v1(22.28,22.91)
  L3 w0.18: LK32.1 15.45,25.4 17.48,23.37 18.56,23.37 19.01,22.91 v1(22.28,22.91)
  BOTTOM w0.18: C29.1 23.38,22.69 23.38,22.69 ; 23.38,22.69 22.5,22.69 v1(22.28,22.91) ; 23.38,22.69 26.05,22.69 26.28,22.46 R28.1 R29.2
VBM_DISCRI: length 18.4
  TOP w0.18: v1(18.19,12.94) 18.19,13.06 18.74,13.61 U1.106
  L3 w0.18: LK33.1 12.82,11.18 13.58,11.94 15.98,11.94 16.99,12.94 v1(18.19,12.94)
  BOTTOM w0.18: v1(18.19,12.94) 18.66,13.42 18.67,13.42 19.1,13.86 22.76,13.86 22.8,13.82 22.98,13.64 C30.2
VBO_DISCRI: length 30
  TOP w0.18: U1.108 21.38,12.61 21.96,12.03 v1(22.45,12.03)
  L3 w0.18: LK37.1 16.51,6.1 v1(22.45,12.03)
  BOTTOM w0.18: 23.38,12.03 R32.1 ; 23.38,12.03 24.82,12.02 24.93,12.13 25.55,12.13 25.66,12.02 C34.2 ; 23.38,12.03 R33.2 ; 23.38,12.03 v1(22.45,12.03)
VBO_FSB: length 15.8
  TOP w0.18: LK49.1 66.92,16.76 66.86,16.82 59.11,16.82 57.32,18.61 v1(56.64,18.61) U1.205
  BOTTOM w0.18: C46.2 57.7,18.61 v1(56.64,18.61)
VBO_TZ: length 30.9
  TOP w0.18: U1.93 v1(22.49,20.11)
  L3 w0.18: LK36.1 12.75,20.32 13.85,21.42 15.16,21.42 16.23,20.36 20.18,20.36 20.43,20.11 v1(22.49,20.11)
  BOTTOM w0.18: C33.2 22.53,20.07 v1(22.49,20.11) 18.97,20.11 18.51,20.57 R30.1 R31.2
VCASC_FSU: length 13.5
  TOP w0.18: U1.94 v1(18.12,19.61)
  L3 w0.18: LK50.1 13.72,19.3 14.44,20.03 15.49,20.03 15.91,19.61 v1(18.12,19.61)
  BOTTOM w0.18: v1(18.12,19.61) 18.09,19.57 C47.2
VCASC_NMOS: length 19.1
  TOP w0.18: LK46.1 64.52,26.92 62.23,29.21 58.36,29.21 57.21,30.36 56,30.36 55.75,30.61 U1.229 51.87,30.61 v1(51.83,30.57)
  BOTTOM w0.18: C43.2 v1(51.83,30.57)
VCASC_PMOS: length 21.4
  TOP w0.18: v1(18.18,30.63) 18.39,30.63 18.87,31.11 U1.71
  L3 w0.18: LK42.1 11.34,36.58 14.89,33.02 15.78,33.02 v1(18.18,30.63)
  BOTTOM w0.18: C39.2 17.43,30.7 17.5,30.63 v1(18.18,30.63)
VGAIN_PA: length 15.4
  TOP w0.18: v1(18.14,32.29) 18.22,32.29 18.4,32.11 U1.69
  L3 w0.18: LK16.1 12.83,37.59 v1(18.14,32.29)
  BOTTOM w0.18: C18.2 17.69,32.07 17.9,32.29 v1(18.14,32.29)
VH: length 13.8
  TOP w0.18: U1.190 52.65,11.11 51.94,11.82
  TOP w0.3: v1(51.03,11.82) 51.94,11.82
  BOTTOM w0.18: 51.01,11.82 v1(51.03,11.82) ; RG1.6 43.94,15.35 ; 46.36,13.41 C48.1 ; 50.16,12.66 50.16,12.66 C51.2
  BOTTOM w0.3: C48.1 48.73,13.41 49.48,12.66 50.16,12.66 ; 50.16,12.66 51.01,11.82 ; RG1.6 RG1.5 ; 46.36,13.41 45.45,14.33 44.96,14.33 43.94,15.35
VL: length 8
  TOP w0.18: v1(50.94,9.61) 51.9,9.61 51.9,9.61 U1.187
  BOTTOM w0.18: D1.2 47.79,8.92 48.04,9.17 R42.1 49.04,9.88 49.17,9.75 C50.2 50.8,9.75 v1(50.94,9.61)
VREF_DAC: length 14
  TOP w0.18: U1.88 18.66,22.61 18.66,22.62 v1(17.8,22.62)
  L3 w0.18: v1(17.8,22.62) 16.75,22.62 15.75,23.62 13.36,23.62 13.1,23.37 LK20.1
  BOTTOM w0.18: v1(17.8,22.62) 17.8,23.29 17.52,23.57 C22.2
VREF_FSB: length 19.2
  TOP w0.18: LK21.1 62.27,18.8 60,21.07 59.96,21.07 59.91,21.12 59.05,21.12 58.14,20.21 56.34,20.21 56.2,20.36 55.58,20.36 55.33,20.11 U1.208 v1(51.84,20.11)
  BOTTOM w0.18: v1(51.84,20.11) 50.66,20.11 C23.2
VREF_FSU: length 18.4
  TOP w0.18: U1.96 v1(17.75,18.61)
  L3 w0.18: v1(17.75,18.61) 17.13,18.61 16.9,18.38 3.79,18.38 LK24.1
  BOTTOM w0.18: v1(17.75,18.61) 17.72,18.57 C26.2
VREF_RAMP: length 30.6
  TOP w0.18: U1.99 v1(22.15,17.11)
  L3 w0.18: LK17.1 10.94,14.22 11.71,14.99 13.97,14.99 14.58,14.38 15.39,14.38 16.93,15.91 20.95,15.91 v1(22.15,17.11)
  BOTTOM w0.18: 25.38,17.9 25.38,17.9 R20.1 ; 25.38,17.9 27.13,17.9 27.38,17.66 R21.2 ; 25.38,17.9 23.53,17.9 23.37,17.74 23.37,17.08 C19.2 22.86,17.07 22.83,17.11 v1(22.15,17.11)
VREF_SS: length 15.8
  TOP w0.18: U1.75 v1(18.15,29.11)
  L3 w0.18: LK18.1 9.23,35.56 9.48,35.32 9.48,35.31 14.63,30.15 17.11,30.15 v1(18.15,29.11)
  BOTTOM w0.18: v1(18.15,29.11) 17.48,29.11 17.44,29.07 C20.2
